# Altium PCB sumoLab.PcbDoc
Units mil, origin at the board's own origin, x right, y up, seen from the top; angles counter-clockwise.
Board outline 6000 x 4000 mil, 2 copper layers (Top Layer, Bottom Layer); 18 components, 16 nets, 86 pads, 0 vias.
Unrouted connection lines stored in the file: 45.
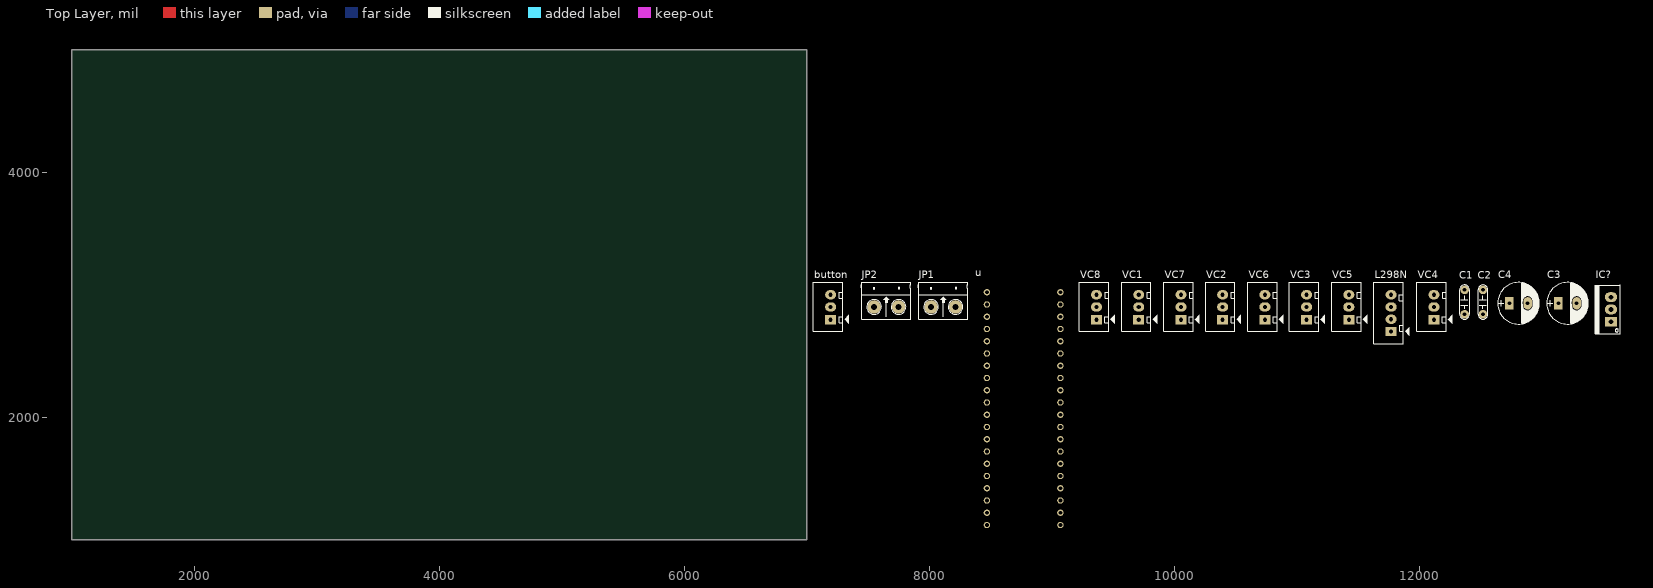
[diagram p0: Top Layer view]
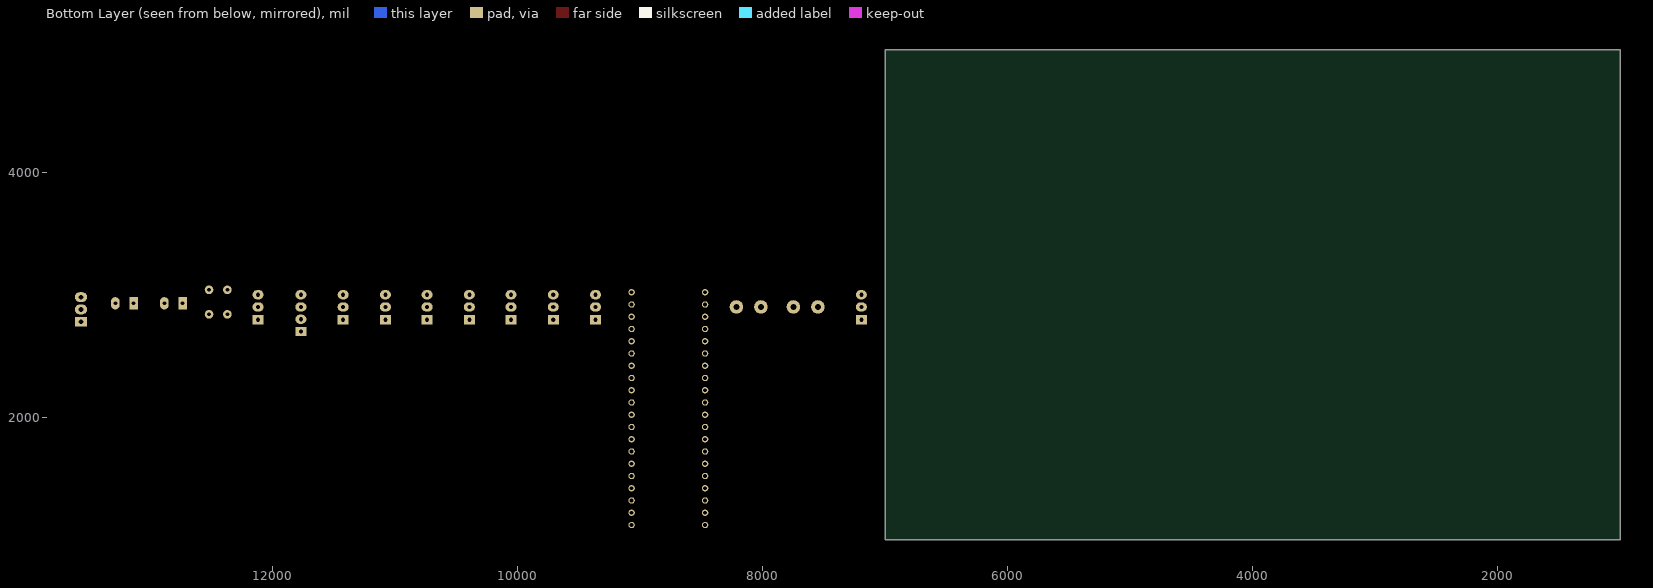
[diagram p1: Bottom Layer view, seen from below]

## Layer stack, top to bottom
Top Solder: solder mask 0.4, Solder Resist, Dk 3.5
Top Layer: signal copper 1.4
Dielectric 1: dielectric 12.6, FR-4, Dk 4.8
Bottom Layer: signal copper 1.4
Bottom Solder: solder mask 0.4, Solder Resist, Dk 3.5

## Board outline
1000,1000 7000,1000 7000,5000 1000,5000

## Design rules (kind name [scope] priority, off if disabled: settings)
Clearance [All] p1: gap=10 ignorepadtopadclearanceinfootprint=FALSE except(0: Arc-Hole Track-Hole SMDPad-Hole THPad-Hole Via-Hole Fill-Hole Poly-Hole Region-Hole Text-Hole)
PolygonConnect [All] p1: connectstyle=Relief reliefconductorwidth=10 reliefentries=4 polygonreliefangle="90 Angle" airgapwidth=10
RoutingVias [All] p1: holewidth=28 width=50 viastyle="Through Hole" minholewidth=28 minwidth=50 maxholewidth=28 maxwidth=50
SolderMaskExpansion [All] p1: expansion=4
Width [All] p1: maxlimit=10 minlimit=10 preferedwidth=10
30 further rules are at their usual default settings.

## Components (designator, comment, footprint, x,y, rotation, side; value= is the part's Value field where it differs from the comment)
button "Button" Header3 7195,2800 r90 top
C1 "104" CN2 12370,2840 r90 top value=0.1uF
C2 "104" CN2 12520,2840 r90 top value=0.1uF
C3 "1000uF/16V" CP1.5/3.4 13135,2930 r0 top value=100uF/35V/50V
C4 "1000uF/16V" CP1.5/3.4 12735,2930 r0 top value=100uF/35V/50V
IC? "LM7805" QTO-220 13565,2780 r90 top
JP1 "Header 2_1" HED2 8015,2900 r0 top value="Header 2"
JP2 "Header 2_1" HED2 7550,2900 r0 top value="Header 2"
L298N "" Header4 11770,2700 r90 top
u "BLUE_PILL" BLUE_PILL 8770,2420 r0 top
VC1 "VC1" Header3 9710,2800 r90 top
VC2 "VC2" Header3 10395,2800 r90 top
VC3 "VC3" Header3 11080,2800 r90 top
VC4 "VC4" Header3 12120,2800 r90 top
VC5 "VC4" Header3 11425,2800 r90 top
VC6 "VC4" Header3 10740,2800 r90 top
VC7 "VC4" Header3 10055,2800 r90 top
VC8 "VC4" Header3 9365,2800 r90 top

## Footprints (in the part's own frame and the unit in brackets; to place one, negate y for a bottom-side part, rotate by r counter-clockwise, add the part's x,y. Pads: shape width x height; smd on the part's side, far side on the other; paste and mask are expansions set on the pad)
BLUE_PILL [mil]
  round 51.5 / inner round 60 / far side round 51.5 hole 31.5: P$1(-300,600) P$2(-300,500) P$3(-300,400) P$4(-300,300) P$5(-300,200) P$6(-300,100) P$7(-300,0) P$8(-300,-100) P$9(-300,-200) P$10(-300,-300) P$11(-300,-400) P$12(-300,-500) P$13(-300,-600) P$14(-300,-700) P$15(-300,-800) P$16(-300,-900) P$17(-300,-1000) P$18(-300,-1100) P$19(-300,-1200) P$20(-300,-1300) P$21(300,600) P$22(300,500) P$23(300,400) P$24(300,300) P$25(300,200) P$26(300,100) P$27(300,0) P$28(300,-100) P$29(300,-200) P$30(300,-300) P$31(300,-400) P$32(300,-500) P$33(300,-600) P$34(300,-700) P$35(300,-800) P$36(300,-900) P$37(300,-1000) P$38(300,-1100) P$39(300,-1200) P$40(300,-1300)
CN2 [mil]
  round 70 hole 31: 1(0,0) 2(200,0)
  silkscreen extent -40,-40 240,40, body extent -54,-44 260,55, height 407
CP1.5/3.4 [mil] "Tu hoa 220->470uF,16V, 470uF/16V,25V"
  rect 70x100 hole 32: 1(0,0)
  oval 70x100 hole 32: 2(150,0)
  silkscreen extent -95,-170 245,170, body extent -85,-157 230,157, height 446
Header3 [mil] "CON 3"
  rect 75x90 hole 34: 1(-5,0)
  oval 75x90 hole 34: 2(100,0) 3(200,0)
  silkscreen extent -100,-150 300,140, body extent -95,-90 295,136, height 276
Header4 [mil] "CON4"
  rect 75x90 hole 34: 1(0,0)
  oval 75x90 hole 34: 2(100,0) 3(200,0) 4(300,0)
  silkscreen extent -100,-150 400,140, body extent -90,-90 398,136, height 276
HED2 [mil] "Header 2, 2 pin, hight 300mil, Pin to Pin 200, Colour Green"
  round 110 hole 50: 1(0,0) 2(200,0)
  silkscreen extent -106,-100 300,200, body extent -92,-140 302,155, height 394
QTO-220 [mil] "TO-220 - 1-2-3"
  rect 80x100 hole 39: 1(0,0)
  oval 80x100 hole 39: 2(100,0) 3(200,0)
  silkscreen extent -100,-76 300,130, body extent -119,-64 322,121, height 755

## Part data
button VC1 VC2 VC3 VC4 VC5 VC6 VC7 VC8: library part Header3, "Header IDC, 3 x 1 Pin Vertical 2.54mm Pitch (Non-Boxed, Male)", Manufacturer="Würth Elektronik eiSos GmbH", partNo=613002143121, ComponentLink1 Description=Manufacturer, ComponentLink1URL=http://www.we-online.com, ComponentLink2 Description=Datasheet, ComponentLink2URL=http://katalog.we-online.de/em/datasheet/6130xx143121.pdf, Created by="Karrer Zheng", Created Date="29 March 2013", NoPins=02
C1 C2: library part CN2, "Cap np 104 => 105pF"
C3 C4: library part CP3, "Cap 100uF/35V - 470uF/16V", Description 1="1000uF/6,3V - 470uF/16V - 330uF - 25V", Description 2="220uF/35V - 100uF/50V - 63V - 4,7uF/200V", Description 3="22uF => 33uF100V - 3,3uF => 4,7uF/250V", Description 4="2,2uF =>3,3uF/350 - 2,2uF/400V - 1uF/450V"
IC?: library part LM78xx, "On ap +, from + 5 to + 24VDC", =LM7808
JP1 JP2: "Header, 2-Pin", Manufacturer="Generic Components", Class=Connector
L298N: library part Header4, "Header IDC, 4 x 1 Pin Vertical 2.54mm Pitch (Non-Boxed, Male)", Manufacturer="Würth Elektronik eiSos GmbH", partNo=613002143121, ComponentLink1 Description=Manufacturer, ComponentLink1URL=http://www.we-online.com, ComponentLink2 Description=Datasheet, ComponentLink2URL=http://katalog.we-online.de/em/datasheet/6130xx143121.pdf, Created by="Karrer Zheng", Created Date="29 March 2013", NoPins=02
u: DeviceSetName=BLUE_PILL, GateName_1=G$1, LibraryName=BluePill, Package=BLUE_PILL, SymbolName_1=BLUE_PILL

## Nets (pads, with @x,y where several pads share a name; then routed paths per layer and width w, separated by ;. In a path a pad name is that pad's centre, name@x,y a point inside that pad or via, vN(x,y) a via of type N, cw(c..) or ccw(c..) an arc to the next point about the centre after c; other vN are vias at no path point)
GND: button.2 C1.1 C2.1 C3.2 C4.2 IC?.2 JP1.2 JP2.2 u.P$19 u.P$21 u.P$22 VC1.2 VC2.2 VC3.2 VC4.2 VC5.2 VC6.2 VC7.2 VC8.2
Netbutton_1: button.1 u.P$36
Netbutton_3: button.3 C2.2 C3.1 IC?.3 VC2.3 VC3.3 VC4.3 VC5.3 VC6.3 VC7.3 VC8.3
NetC1_2: C1.2 C4.1 IC?.1 JP1.1
NetJP2_1: JP2.1 u.P$18
NetL298N_1: L298N.1 u.P$15
NetL298N_2: L298N.2 u.P$14
NetL298N_3: L298N.3 u.P$13
NetL298N_4: L298N.4 u.P$12
Netu_P$6: u.P$6 VC7.1 VC8.1
Netu_P$7: u.P$7 VC6.1
Netu_P$8: u.P$8 VC5.1
Netu_P$32: u.P$32 VC1.1
Netu_P$33: u.P$33 VC2.1
Netu_P$34: u.P$34 VC3.1
Netu_P$35: u.P$35 VC4.1
pads on no net: u.P$1 u.P$2 u.P$3 u.P$4 u.P$5 u.P$9 u.P$10 u.P$11 u.P$16 u.P$17 u.P$20 u.P$23 u.P$24 u.P$25 u.P$26 u.P$27 u.P$28 u.P$29 u.P$30 u.P$31 u.P$37 u.P$38 u.P$39 u.P$40 VC1.3